# Altium PCB pcb.PCBDOC (part 2 of 2)
Units mil, origin at the board's own origin, x right, y up, seen from the top; angles counter-clockwise.
Board outline 6250 x 3000 mil, 6 copper layers (Top Layer, Mid-Layer 1, Internal Plane 1, Internal Plane 2, Mid-Layer 2, Bottom Layer); 199 components, 348 nets, 1713 pads, 133 vias.
Unrouted connection lines stored in the file: 1010.
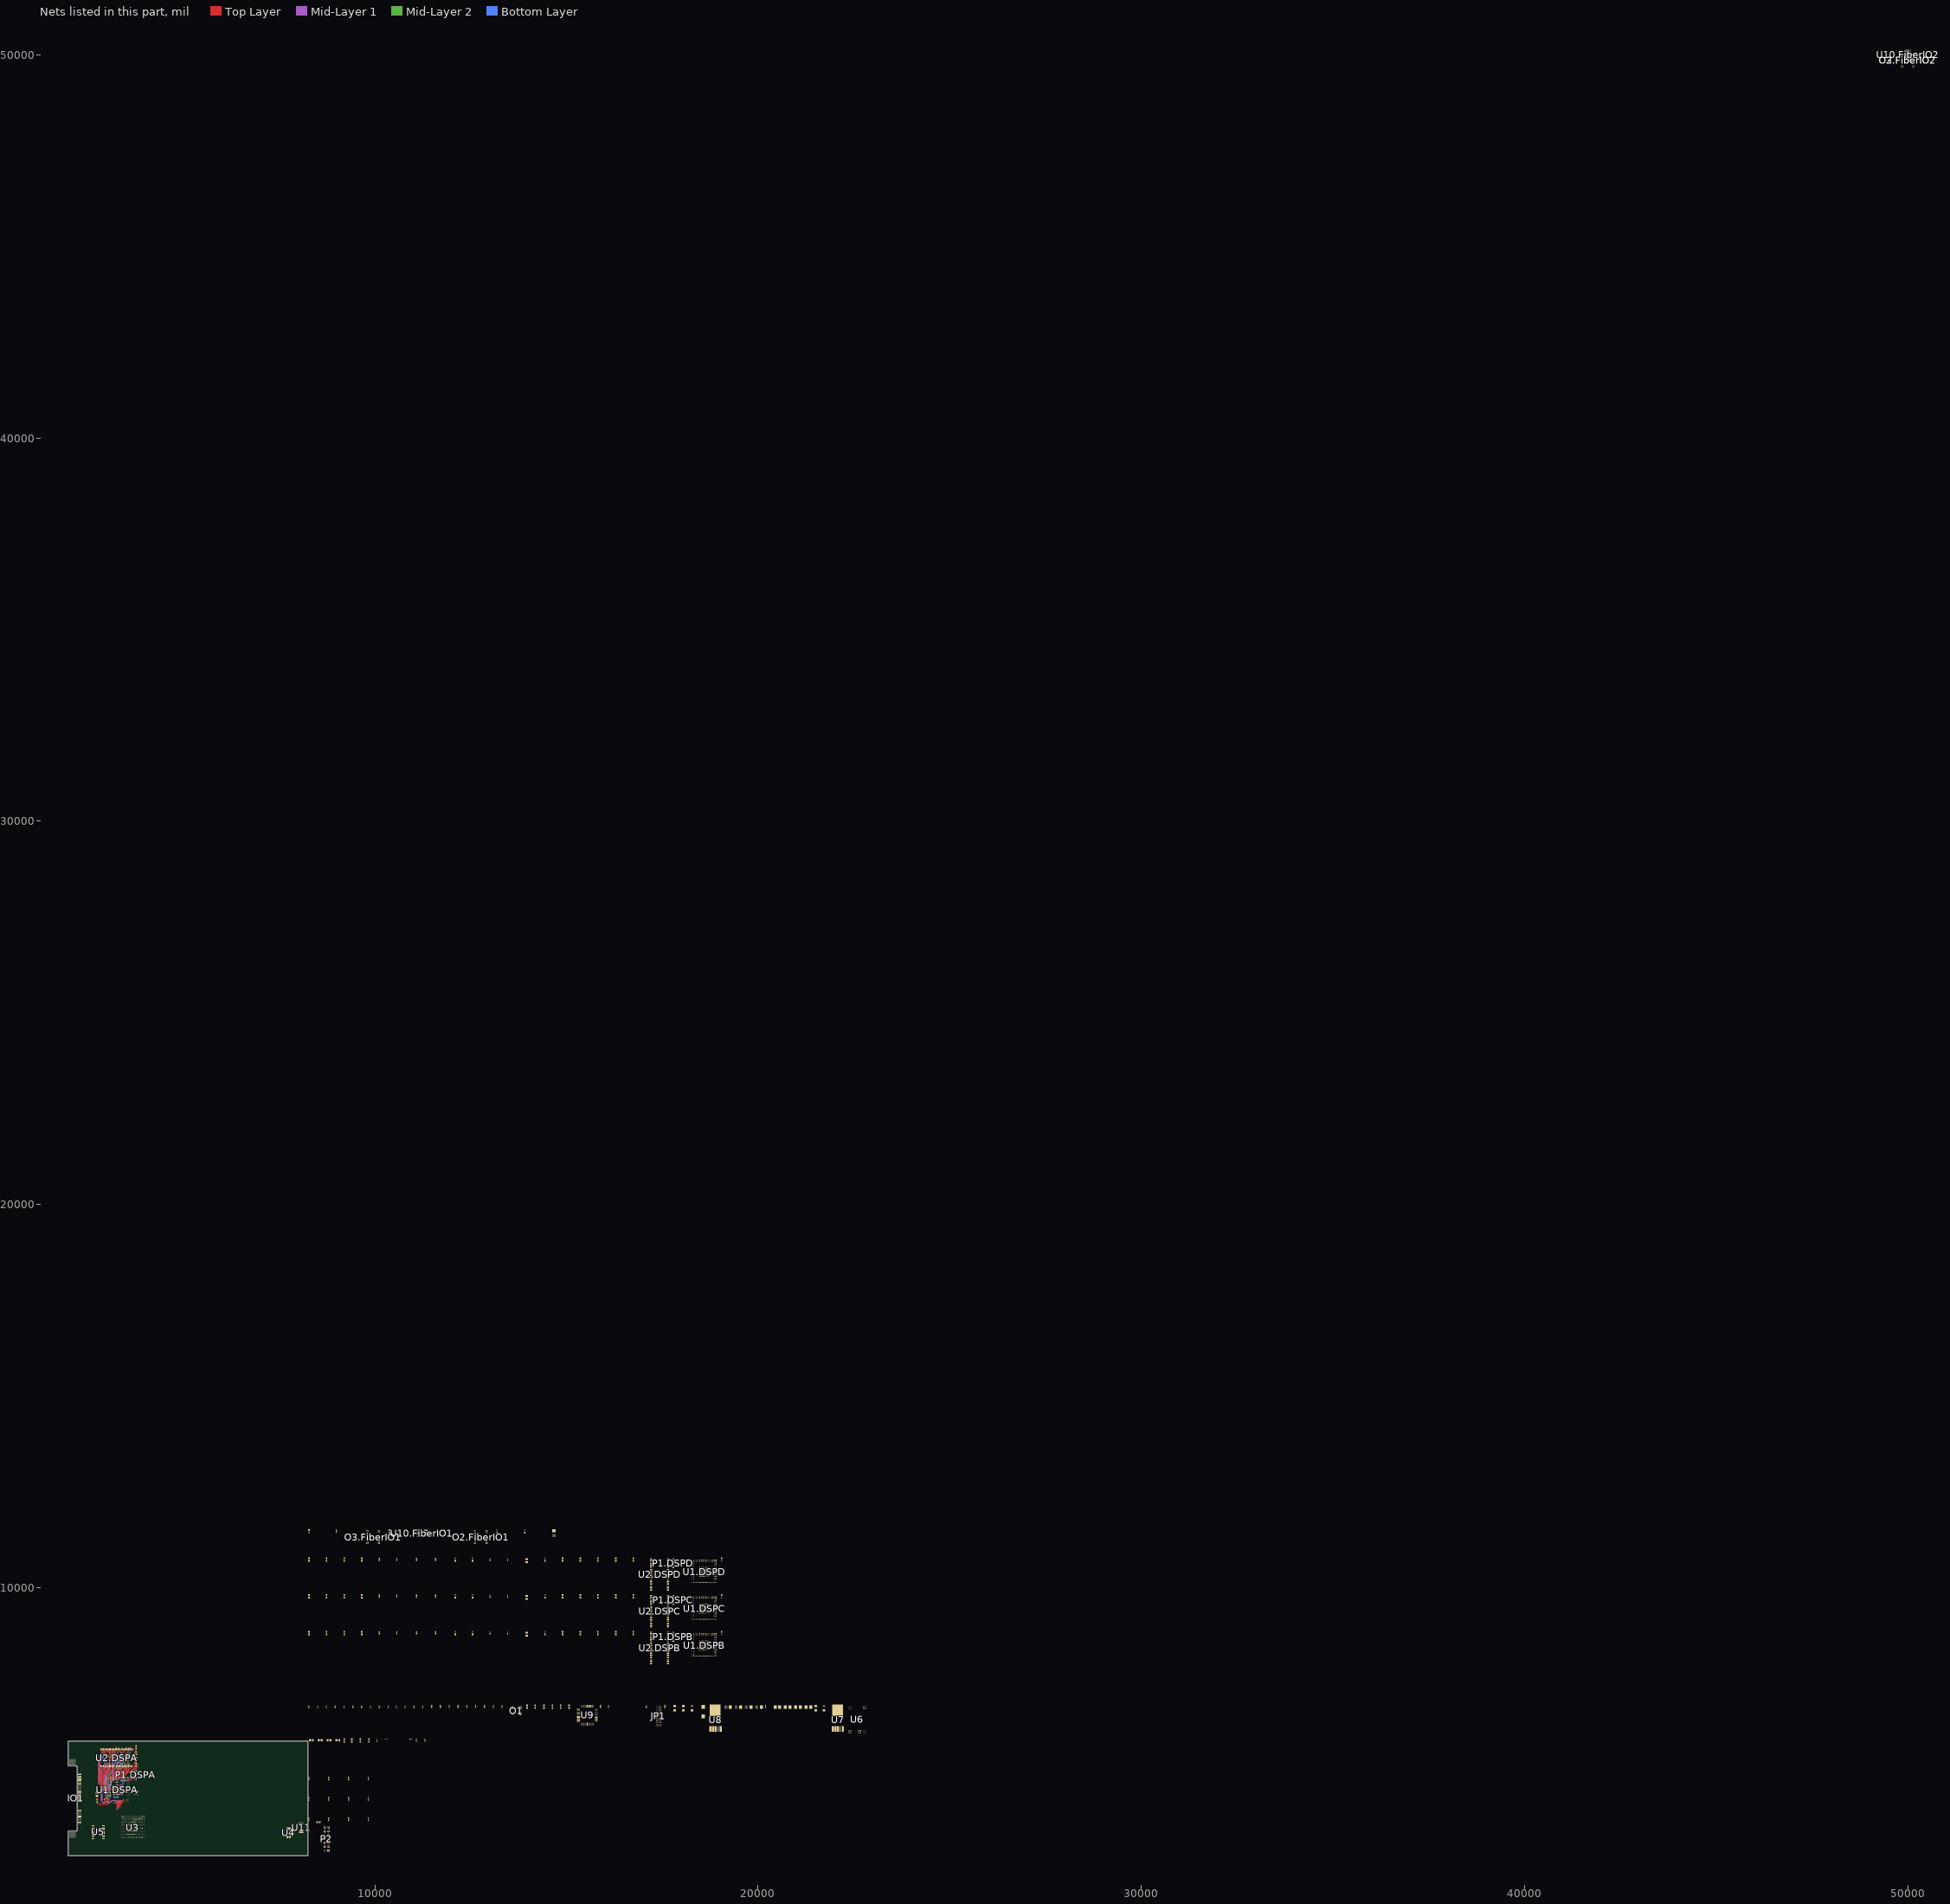
[diagram p6: the nets of this part, all layers, seen from the top]

## Via types
v1: diameter 24, hole 10, Top Layer to Bottom Layer, 133 vias

## Nets (pads, with @x,y where several pads share a name; then routed paths per layer and width w, separated by ;. In a path a pad name is that pad's centre, name@x,y a point inside that pad or via, vN(x,y) a via of type N, cw(c..) or ccw(c..) an arc to the next point about the centre after c; other vN are vias at no path point) (continued)
DSPTCK: P2.8 U4.8 U4.13 U11.3 U11.5
DSPTDI: P2.12 U4.11
DSPTDO: P2.14 U11.2
DSPTMS: P2.6 U4.1
FCLK: U3.T15 U9.38
FDONE: U3.R14 U9.37
FPROG: U3.B3 U9.36
GND: C1.DSPA.1 C1.DSPB.1 C1.DSPC.1 C1.DSPD.1 C2.DSPA.1 C2.DSPB.1 C2.DSPC.1 C2.DSPD.1 C3.DSPA.1 C3.DSPB.1 C3.DSPC.1 C3.DSPD.1 C4.DSPA.1 C4.DSPB.1 C4.DSPC.1 C4.DSPD.1 C5.DSPA.1 C5.DSPB.1 C5.DSPC.1 C5.DSPD.1 C6.DSPA.1 C6.DSPB.1 C6.DSPC.1 C6.DSPD.1 C7.DSPB.1 C7.DSPC.1 C7.DSPD.1 C8.DSPB.1 C8.DSPC.1 C8.DSPD.1 C9.DSPA.1 C9.DSPB.1 C9.DSPC.1 C9.DSPD.1 C10.DSPA.1 C10.DSPB.1 C10.DSPC.1 C10.DSPD.1 C11.DSPB.1 C11.DSPC.1 C11.DSPD.1 C12.DSPA.1 C12.DSPB.1 C12.DSPC.1 C12.DSPD.1 C13.1 C14.1 C15.1 C16.1 C17.2 C18.2 C19.2 C20.2 C21.2 C22.2 C23.2 C24.2 C25.2 C26.2 C27.1 C28.1 C29.2 C30.1 C31.1 C32.1 C33.1 C34.1 C35.1 C36.1 C37.1 C38.1 C39.1 C40.1 C41.1 C42.1 C43.1 C44.1 C45.1 C46.1 C47.1 C48.1 C49.1 C50.1 C51.1 C52.1 C53.1 C54.1 C55.1 C56.FiberIO1.2 C56.FiberIO2.2 C57.FiberIO1.2 C57.FiberIO2.2 C58.FiberIO1.2 C58.FiberIO2.2 C59.DSPA.1 C59.DSPB.1 C59.DSPC.1 C59.DSPD.1 C60.DSPA.1 C60.DSPB.1 C60.DSPC.1 C60.DSPD.1 C61.DSPA.1 C61.DSPB.1 C61.DSPC.1 C61.DSPD.1 C62.DSPA.1 C62.DSPB.1 C62.DSPC.1 C62.DSPD.1 DS1.DSPA.2 DS1.DSPB.2 DS1.DSPC.2 DS1.DSPD.2 DS2.2 DS3.2 DS4.2 DS5.2 IO1.1 IO1.4 IO1.7 IO1.P4 IO1.P5 IO1.P6 IO1.P10 IO1.P12 JP1.1 JP1.3 JP1.5 JP1.7 JP1.9 JP1.11 JP1.13 O1.2 O2.FiberIO1.3 O2.FiberIO1.4 O2.FiberIO1.5 O2.FiberIO1.8 O2.FiberIO2.3 O2.FiberIO2.4 O2.FiberIO2.5 O2.FiberIO2.8 O3.FiberIO1.2 O3.FiberIO1.4 O3.FiberIO1.5 O3.FiberIO1.8 O3.FiberIO2.2 O3.FiberIO2.4 O3.FiberIO2.5 O3.FiberIO2.8 P1.DSPA.3 P1.DSPB.3 P1.DSPC.3 P1.DSPD.3 P2.1 P2.4 P2.5 P2.7 P2.9 P2.11 P2.13 R4.DSPA.2 R4.DSPB.2 R4.DSPC.2 R4.DSPD.2 R5.DSPA.2 R5.DSPB.2 R5.DSPC.2 R5.DSPD.2 R7.DSPA.1 R7.DSPB.1 R7.DSPC.1 R7.DSPD.1 R10.1 R15.2 U1.DSPA.A10 U1.DSPA.B11 U1.DSPA.B16 U1.DSPA.F11 U1.DSPA.G7 U1.DSPA.G8 U1.DSPA.G9 U1.DSPA.G10 U1.DSPA.G11 U1.DSPA.H7 U1.DSPA.H8 U1.DSPA.H9 U1.DSPA.H10 U1.DSPA.H11 U1.DSPA.J7 U1.DSPA.J8 U1.DSPA.J9 U1.DSPA.J10 U1.DSPA.J11 U1.DSPA.K7 U1.DSPA.K8 U1.DSPA.K9 U1.DSPA.K10 U1.DSPA.K11 U1.DSPA.L7 U1.DSPA.L8 U1.DSPA.L9 U1.DSPA.L10 U1.DSPA.L11 U1.DSPA.M9 U1.DSPA.T16 U1.DSPB.A10 U1.DSPB.B11 U1.DSPB.B16 U1.DSPB.F11 U1.DSPB.G7 U1.DSPB.G8 U1.DSPB.G9 U1.DSPB.G10 U1.DSPB.G11 U1.DSPB.H7 U1.DSPB.H8 U1.DSPB.H9 U1.DSPB.H10 U1.DSPB.H11 U1.DSPB.J7 U1.DSPB.J8 U1.DSPB.J9 U1.DSPB.J10 U1.DSPB.J11 U1.DSPB.K7 U1.DSPB.K8 U1.DSPB.K9 U1.DSPB.K10 U1.DSPB.K11 U1.DSPB.L7 U1.DSPB.L8 U1.DSPB.L9 U1.DSPB.L10 U1.DSPB.L11 U1.DSPB.M9 U1.DSPB.T16 U1.DSPC.A10 U1.DSPC.B11 U1.DSPC.B16 U1.DSPC.F11 U1.DSPC.G7 U1.DSPC.G8 U1.DSPC.G9 U1.DSPC.G10 U1.DSPC.G11 U1.DSPC.H7 U1.DSPC.H8 U1.DSPC.H9 U1.DSPC.H10 U1.DSPC.H11 U1.DSPC.J7 U1.DSPC.J8 U1.DSPC.J9 U1.DSPC.J10 U1.DSPC.J11 U1.DSPC.K7 U1.DSPC.K8 U1.DSPC.K9 U1.DSPC.K10 U1.DSPC.K11 U1.DSPC.L7 U1.DSPC.L8 U1.DSPC.L9 U1.DSPC.L10 U1.DSPC.L11 U1.DSPC.M9 U1.DSPC.T16 U1.DSPD.A10 U1.DSPD.B11 U1.DSPD.B16 U1.DSPD.F11 U1.DSPD.G7 U1.DSPD.G8 U1.DSPD.G9 U1.DSPD.G10 U1.DSPD.G11 U1.DSPD.H7 U1.DSPD.H8 U1.DSPD.H9 U1.DSPD.H10 U1.DSPD.H11 U1.DSPD.J7 U1.DSPD.J8 U1.DSPD.J9 U1.DSPD.J10 U1.DSPD.J11 U1.DSPD.K7 U1.DSPD.K8 U1.DSPD.K9 U1.DSPD.K10 U1.DSPD.K11 U1.DSPD.L7 U1.DSPD.L8 U1.DSPD.L9 U1.DSPD.L10 U1.DSPD.L11 U1.DSPD.M9 U1.DSPD.T16 U2.DSPA.6 U2.DSPA.12 U2.DSPA.28 U2.DSPA.41 U2.DSPA.46 U2.DSPA.52 U2.DSPA.54 U2.DSPB.6 U2.DSPB.12 U2.DSPB.28 U2.DSPB.41 U2.DSPB.46 U2.DSPB.52 U2.DSPB.54 U2.DSPC.6 U2.DSPC.12 U2.DSPC.28 U2.DSPC.41 U2.DSPC.46 U2.DSPC.52 U2.DSPC.54 U2.DSPD.6 U2.DSPD.12 U2.DSPD.28 U2.DSPD.41 U2.DSPD.46 U2.DSPD.52 U2.DSPD.54 U3.A1 U3.A16 U3.B2 U3.B9 U3.B15 U3.F6 U3.F11 U3.G7 U3.G8 U3.G9 U3.G10 U3.H2 U3.H7 U3.H8 U3.H9 U3.H10 U3.J7 U3.J8 U3.J9 U3.J10 U3.J15 U3.K7 U3.K8 U3.K9 U3.K10 U3.L6 U3.L11 U3.R2 U3.R8 U3.R15 U3.T1 U3.T16 U4.7 U5.1 U5.12 U5.13 U5.14 U5.20 U5.22 U6.1 U7.3 U8.3 U9.4 U9.17 U9.25 U10.FiberIO1.4 U10.FiberIO1.6 U10.FiberIO1.7 U10.FiberIO2.4 U10.FiberIO2.6 U10.FiberIO2.7 U11.7 | length 1591.9
  Top Layer w7: DS1.DSPA.2@2744.09,4641.73 v1(2744.09,4716.54) ; U1.DSPA.B16@2992.13,4448.82 v1(3019.68,4476.38) ; U1.DSPA.T16@2992.13,5000 v1(3021.65,4970.47) ; U1.DSPA.B11@3188.98,4448.82 v1(3188.98,4484.25) ; v1(3188.98,4574.8) U1.DSPA.F11@3188.98,4606.3 ; U1.DSPA.L11@3188.98,4803.15 v1(3208.66,4783.46) ; v1(3200.79,4370.08) 3228.35,4397.64 U1.DSPA.A10@3228.35,4409.45 ; U1.DSPA.L10@3228.35,4803.15 v1(3248.03,4783.46) U1.DSPA.L9@3267.72,4803.15 ; U1.DSPA.M9@3267.72,4842.52 v1(3267.72,4874.02) ; U2.DSPA.46@3417.48,5341.5 3417.48,5293.15 v1(3425.2,5285.43) ; v1(3732.28,5870.08) R5.DSPA.2@3769.68,5870.08 ; R4.DSPA.2@3767.72,5566.93 v1(3807.09,5566.93) ; R7.DSPA.1@3799.21,4679.13 v1(3799.21,4720.47)
  Top Layer w12: U2.DSPA.28@2850.55,5341.5 v1(2850.55,5394.45) ; U2.DSPA.41@3260,5341.5 v1(3260,5395) ; v1(3320,5830) 3322.99,5827.01 U2.DSPA.12@3322.99,5778.5 ; U2.DSPA.6@3511.97,5778.5 v1(3511.97,5831.97) ; v1(3590,5400) 3606.46,5383.54 U2.DSPA.52@3606.46,5341.5 ; U2.DSPA.54@3669.45,5341.5 3691.5,5341.5 v1(3700,5350)
  Bottom Layer w7: v1(3019.68,4476.38) 3019.68,4537.46 C2.DSPA.1@3049.15,4566.93 ; v1(3019.68,4673.23) 3027.5,4681.04 C4.DSPA.1@3027.5,4714.57 ; C3.DSPA.1@3183.13,4822.83 3183.13,4808.99 v1(3208.66,4783.46) ; C1.DSPA.1@3271.65,4921.26 v1(3314.96,4921.26)
  Bottom Layer w12: v1(3260,5395) 3274.41,5380.59 C61.DSPA.1@3274.41,5340 ; C60.DSPA.1@3305.59,5780 3305.59,5815.59 v1(3320,5830) ; v1(3511.97,5831.97) 3526.16,5817.78 C59.DSPA.1@3526.16,5780 ; C62.DSPA.1@3573.84,5340 3573.84,5383.84 v1(3590,5400)
  Bottom Layer w14: v1(3188.98,4574.8) 3188.98,4553.15 C6.DSPA.1@3214.57,4527.56 ; v1(3287.4,4665.35) 3301.18,4651.57 C12.DSPA.1@3301.18,4616.14 ; v1(3326.77,4704.72) 3342.46,4720.41 C10.DSPA.1@3366.14,4720.41 ; v1@3393.64,4925.26 C5.DSPA.1@3393.64,4960.63 ; v1(3397.64,4921.26) 3423.17,4895.73 C9.DSPA.1@3425.2,4895.73
  other v1: 3208.66,4665.35 3248.03,4665.35 3326.77,4665.35 3208.66,4704.72 3248.03,4704.72 3287.4,4704.72 3208.66,4744.09 3248.03,4744.09 3287.4,4744.09 3326.77,4744.09 3287.4,4783.46 3326.77,4783.46
NetC21_1: C21.1 U7.5
NetC29_1: C29.1 U8.5
NetC58.FiberIO1_1: C58.FiberIO1.1 O3.FiberIO1.3 R25.FiberIO1.2
NetC58.FiberIO2_1: C58.FiberIO2.1 O3.FiberIO2.3 R25.FiberIO2.2
NetDS1.DSPA_1: DS1.DSPA.1 R6.DSPA.2 | length 100.4
  Top Layer w7: R6.DSPA.2@2748.03,4470.47 DS1.DSPA.1@2748.03,4570.87
NetDS1.DSPB_1: DS1.DSPB.1 R6.DSPB.2
NetDS1.DSPC_1: DS1.DSPC.1 R6.DSPC.2
NetDS1.DSPD_1: DS1.DSPD.1 R6.DSPD.2
NetDS2_1: DS2.1 R11.2
NetDS3_1: DS3.1 R12.2
NetDS4_1: DS4.1 R13.2
NetDS5_1: DS5.1 R14.2
NetIO1_P13: IO1.P13 IO1.P14 IO1.P15 U9.8
NetO1_3: O1.3 U3.R9 U9.1
NetO2.FiberIO1_1: O2.FiberIO1.1 R22.FiberIO1.1
NetO2.FiberIO1_2: O2.FiberIO1.2 R23.FiberIO1.1 U10.FiberIO1.3
NetO2.FiberIO2_1: O2.FiberIO2.1 R22.FiberIO2.1
NetO2.FiberIO2_2: O2.FiberIO2.2 R23.FiberIO2.1 U10.FiberIO2.3
NetO3.FiberIO1_1: O3.FiberIO1.1 R24.FiberIO1.2
NetO3.FiberIO2_1: O3.FiberIO2.1 R24.FiberIO2.2
NetP1.DSPA_1: P1.DSPA.1 U1.DSPA.R2 | length 241.3
  Top Layer w7: U1.DSPA.R2@3543.31,4960.63 3562.99,4980.31 3651.57,4980.31 3691.26,5020 P1.DSPA.1@3760,5020
NetP1.DSPA_2: P1.DSPA.2 U1.DSPA.T1 | length 226.1
  Top Layer w7: U1.DSPA.T1@3582.68,5000 3592.52,5000 3710.63,5118.11 P1.DSPA.2@3759.84,5118.11
NetP1.DSPB_1: P1.DSPB.1 U1.DSPB.R2
NetP1.DSPB_2: P1.DSPB.2 U1.DSPB.T1
NetP1.DSPC_1: P1.DSPC.1 U1.DSPC.R2
NetP1.DSPC_2: P1.DSPC.2 U1.DSPC.T1
NetP1.DSPD_1: P1.DSPD.1 U1.DSPD.R2
NetP1.DSPD_2: P1.DSPD.2 U1.DSPD.T1
NetP2_3: P2.3
NetR2.DSPA_2: R2.DSPA.2 R4.DSPA.1 U1.DSPA.T5 | length 757.3
  Top Layer w7: U1.DSPA.T5@3425.2,5000 3444.88,5019.69 3444.88,5055.12 3582.68,5192.91 3649.61,5192.91 3740.16,5283.46 3783.46,5283.46 3811.02,5311.02 3811.02,5397.64 3795.28,5413.39 3767.72,5413.39 3769.68,5415.35 R4.DSPA.1@3769.68,5498.03
NetR2.DSPB_2: R2.DSPB.2 R4.DSPB.1 U1.DSPB.T5
NetR2.DSPC_2: R2.DSPC.2 R4.DSPC.1 U1.DSPC.T5
NetR2.DSPD_2: R2.DSPD.2 R4.DSPD.1 U1.DSPD.T5
NetR3.DSPA_2: R3.DSPA.2 R5.DSPA.1 U1.DSPA.U5 | length 946.8
  Top Layer w7: U1.DSPA.U5@3425.2,5039.37 3425.2,5062.99 3578.74,5216.54 3629.92,5216.54 3732.28,5318.9 3732.28,5692.91 3748.03,5708.66 3765.75,5708.66 R3.DSPA.2@3769.68,5712.6 R5.DSPA.1@3769.68,5803.15
NetR3.DSPB_2: R3.DSPB.2 R5.DSPB.1 U1.DSPB.U5
NetR3.DSPC_2: R3.DSPC.2 R5.DSPC.1 U1.DSPC.U5
NetR3.DSPD_2: R3.DSPD.2 R5.DSPD.1 U1.DSPD.U5
NetR6.DSPA_1: R6.DSPA.1 U1.DSPA.B4 | length 787.8
  Top Layer w7: R6.DSPA.1@2755.91,4395.67 2801.18,4350.39 v1(3039.37,4350.39) ; v1(3440.94,4472.44) U1.DSPA.B4@3464.57,4448.82
  Mid-Layer 1 w7: v1(3039.37,4350.39) 3137.8,4448.82 3417.32,4448.82 v1(3440.94,4472.44)
NetR6.DSPB_1: R6.DSPB.1 U1.DSPB.B4
NetR6.DSPC_1: R6.DSPC.1 U1.DSPC.B4
NetR6.DSPD_1: R6.DSPD.1 U1.DSPD.B4
NetR7_1: R7.1 U1.DSPA.U1 U1.DSPB.U1 U1.DSPC.U1 U1.DSPD.U1 U4.3
NetR11_1: R11.1 U3.T14
NetR12_1: R12.1 U3.T13
NetR13_1: R13.1 U3.T12
NetR14_1: R14.1 U3.T10
NetR15_1: R15.1 U6.4
NetR16_2: R16.2 U3.C14
NetR17_1: R17.1 U9.11
NetR18_1: R18.1 U9.10
NetR19_1: R19.1 U3.C13
NetR20_1: R20.1 U9.24
NetR20_2: R20.2 U3.A2
NetR21_1: R21.1 U9.9
NetR24.FiberIO1_1: R24.FiberIO1.1 U3.N10
NetR24.FiberIO2_1: R24.FiberIO2.1 U3.R11
NetU1.DSPA_J16: U1.DSPA.J16 U2.DSPA.23 | length 1253.7
  Top Layer w7: v1(2976.54,5641.89) U2.DSPA.23@2976.54,5778.5 ; U1.DSPA.J16@2992.13,4724.41 2996.06,4724.41 v1(3019.68,4748.03)
  Bottom Layer w7: v1(2976.54,5641.89) 2807.09,5472.44 2807.09,4913.39 2972.44,4748.03 v1(3019.68,4748.03)
NetU1.DSPA_J17: U1.DSPA.J17 U2.DSPA.24 | length 1184.6
  Top Layer w7: U2.DSPA.24@2945.04,5778.5 2945.04,5685.2 2791.34,5531.5 2791.34,4885.83 U1.DSPA.J17@2952.76,4724.41
NetU1.DSPA_K16: U1.DSPA.K16 U2.DSPA.25 | length 1172.9
  Top Layer w7: v1(2913.39,5716.54) U2.DSPA.25@2913.39,5779.53 ; U1.DSPA.K16@2992.13,4763.78 3015.75,4787.4 v1(3019.68,4787.4)
  Mid-Layer 1 w7: v1(2913.39,5527.56) v1(2913.39,5716.54)
  Bottom Layer w7: v1(2913.39,5527.56) 2826.77,5440.94 2826.77,5358.27 2834.65,5350.39 2834.65,4925.2 2972.44,4787.4 v1(3019.68,4787.4)
NetU1.DSPA_K17: U1.DSPA.K17 U2.DSPA.26 | length 1101.2
  Top Layer w7: v1(2818.9,5519.69) 2818.9,4897.64 U1.DSPA.K17@2952.76,4763.78 ; v1(2881.89,5696.85) U2.DSPA.26@2881.89,5783.46
  Mid-Layer 1 w7: v1(2818.9,5519.69) 2818.9,5633.86 v1(2881.89,5696.85)
NetU1.DSPA_L16: U1.DSPA.L16 U2.DSPA.29 | length 653
  Top Layer w7: v1(2862.2,5283.46) 2881.89,5303.15 U2.DSPA.29@2881.89,5341.34 ; U1.DSPA.L16@2992.13,4803.15 v1(3019.68,4830.71)
  Bottom Layer w7: v1(2862.2,5283.46) 2862.2,4937.01 2968.5,4830.71 v1(3019.68,4830.71)
NetU1.DSPA_L17: U1.DSPA.L17 U2.DSPA.30 | length 615.1
  Top Layer w7: U2.DSPA.30@2913.39,5346.46 2913.39,5299.21 2846.46,5232.28 2846.46,4909.45 U1.DSPA.L17@2952.76,4803.15
NetU1.DSPA_M16: U1.DSPA.M16 U2.DSPA.31 | length 614.6
  Top Layer w7: v1(2889.76,5244.09) 2944.88,5299.21 U2.DSPA.31@2944.88,5341.34 ; U1.DSPA.M16@2992.13,4842.52 v1(3019.68,4870.08)
  Bottom Layer w7: v1(2889.76,5244.09) 2889.76,4952.76 2972.44,4870.08 v1(3019.68,4870.08)
NetU1.DSPA_M17: U1.DSPA.M17 U2.DSPA.32 | length 570.8
  Top Layer w7: U1.DSPA.M17@2952.76,4842.52 2877.95,4917.32 2877.95,5196.85 2976.54,5295.43 U2.DSPA.32@2976.54,5341.5
NetU1.DSPA_N16: U1.DSPA.N16 U2.DSPA.34 | length 579.6
  Top Layer w7: v1(2929.13,5145.67) 3039.53,5256.06 U2.DSPA.34@3039.53,5341.5 ; U1.DSPA.N16@2992.13,4881.89 3011.81,4901.57 v1(3019.68,4901.57)
  Bottom Layer w7: v1(2929.13,5145.67) 2929.13,4956.69 2984.25,4901.57 v1(3019.68,4901.57)
NetU1.DSPA_N17: U1.DSPA.N17 U2.DSPA.33 | length 528.2
  Top Layer w7: U1.DSPA.N17@2952.76,4881.89 2905.51,4929.13 2905.51,5161.42 3011.81,5267.72 U2.DSPA.33@3011.81,5346.46
NetU1.DSPA_P16: U1.DSPA.P16 U2.DSPA.35 | length 618.9
  Top Layer w7: U1.DSPA.P16@2992.13,4921.26 3007.87,4921.26 v1(3019.68,4933.07) ; v1(3039.37,5401.57) 3071.02,5369.92 U2.DSPA.35@3071.02,5341.5
  Mid-Layer 1 w7: v1@3019.68,4937.01 v1(3019.68,4933.07) 2992.13,4960.63 2992.13,5133.86 3051.18,5192.91 3051.18,5389.76 v1(3039.37,5401.57)
NetU1.DSPA_R17: U1.DSPA.R17 U2.DSPA.36 | length 464.4
  Top Layer w7: U1.DSPA.R17@2952.76,4960.63 2925.2,4988.19 2925.2,5106.3 3106.3,5287.4 U2.DSPA.36@3106.3,5338.58
NetU1.DSPA_T3: U1.DSPA.T3 U1.DSPB.T3 U1.DSPC.T3 U1.DSPD.T3 U4.2
NetU1.DSPA_T4: U1.DSPA.T4 U1.DSPB.U3
NetU1.DSPA_T6: U1.DSPA.T6 U2.DSPA.53 | length 460.3
  Top Layer w7: U1.DSPA.T6@3385.83,5000 3405.51,5019.69 3405.51,5068.9 3481.61,5145 3641.73,5305.12 U2.DSPA.53@3641.73,5354.33
NetU1.DSPA_T7: U1.DSPA.T7 U2.DSPA.50 | length 423.1
  Top Layer w7: U1.DSPA.T7@3346.46,5000 3366.14,5019.69 3366.14,5108.27 3543.46,5285.59 U2.DSPA.50@3543.46,5341.5
NetU1.DSPA_T8: U1.DSPA.T8 U2.DSPA.45 | length 390.5
  Top Layer w7: U1.DSPA.T8@3307.09,5000 3287.4,5019.69 3287.4,5127.95 3385.98,5226.54 U2.DSPA.45@3385.98,5341.5
NetU1.DSPA_T9: U1.DSPA.T9 U2.DSPA.42 | length 367.7
  Top Layer w7: U1.DSPA.T9@3267.72,5000 3248.03,5019.68 3248.03,5167.32 3291.5,5210.79 U2.DSPA.42@3291.5,5341.5
NetU1.DSPA_T10: U1.DSPA.T10 U2.DSPA.11 | length 897.2
  Top Layer w7: U1.DSPA.T10@3228.35,5000 v1(3255.91,4972.44) ; v1(3354.33,5712.6) U2.DSPA.11@3354.33,5763.78
  Mid-Layer 1 w7: v1(3255.91,4972.44) 3255.91,4988.19 3385.83,5118.11 3385.83,5681.1 v1(3354.33,5712.6)
NetU1.DSPA_T11: U1.DSPA.T11 U2.DSPA.7 | length 915.1
  Top Layer w7: U1.DSPA.T11@3188.98,5000 3208.66,5019.69 3208.66,5216.54 v1(3257.87,5265.75) ; U2.DSPA.7@3480.47,5791.18 3480.47,5712.44 v1(3484.25,5708.66)
  Mid-Layer 2 w7: v1(3257.87,5265.75) 3484.25,5492.13 v1(3484.25,5708.66)
NetU1.DSPA_T12: U1.DSPA.T12 U2.DSPA.4 | length 1036.4
  Top Layer w7: U1.DSPA.T12@3149.61,5000 v1(3179.13,4970.47) ; v1(3572.83,5718.5) 3574.8,5720.47 U2.DSPA.4@3574.8,5791.34
  Mid-Layer 1 w7: v1(3179.13,4970.47) v1@3188.98,4970.47
  Mid-Layer 2 w7: v1(3179.13,4970.47) 3562.99,5354.33 3562.99,5698.82 3572.83,5708.66 v1(3572.83,5718.5)
NetU1.DSPA_U2: U1.DSPA.U2 U1.DSPB.U2 U1.DSPC.U2 U1.DSPD.U2 U4.6
NetU1.DSPA_U3: U1.DSPA.U3 U4.10
NetU1.DSPA_U4: U1.DSPA.U4 U11.6
NetU1.DSPA_U6: U1.DSPA.U6 U2.DSPA.51 | length 380.5
  Top Layer w7: U1.DSPA.U6@3385.83,5039.37 3385.83,5088.58 3574.96,5277.72 U2.DSPA.51@3574.96,5341.5
NetU1.DSPA_U7: U1.DSPA.U7 U2.DSPA.48 | length 362.2
  Top Layer w7: U1.DSPA.U7@3346.46,5039.37 3346.46,5118.11 3484.25,5255.91 U2.DSPA.48@3484.25,5344.49
NetU1.DSPA_U8: U1.DSPA.U8 U2.DSPA.47 | length 360.9
  Top Layer w7: U1.DSPA.U8@3307.09,5039.37 3307.09,5118.11 3448.98,5260 U2.DSPA.47@3448.98,5341.5
NetU1.DSPA_U9: U1.DSPA.U9 U2.DSPA.44 | length 341.8
  Top Layer w7: U1.DSPA.U9@3267.72,5039.37 3267.72,5147.64 3356.3,5236.22 U2.DSPA.44@3356.3,5344.49
NetU1.DSPA_U10: U1.DSPA.U10 U2.DSPA.13 | length 770.1
  Top Layer w7: U1.DSPA.U10@3228.35,5039.37 3228.35,5187.01 v1(3267.72,5226.38) ; v1(3291.5,5712.44) U2.DSPA.13@3291.5,5778.5
  Mid-Layer 1 w7: v1(3267.72,5226.38) 3297.24,5255.91 3297.24,5706.69 v1(3291.5,5712.44)
NetU1.DSPA_U11: U1.DSPA.U11 U2.DSPA.10 | length 820.5
  Top Layer w7: U1.DSPA.U11@3188.98,5039.37 3188.98,5236.22 v1(3218.5,5265.75) ; v1(3385.83,5724.41) U2.DSPA.10@3385.83,5778.35
  Mid-Layer 2 w7: v1(3218.5,5265.75) 3287.4,5334.65 3287.4,5413.39 3385.83,5511.81 v1(3385.83,5724.41)
NetU1.DSPA_U12: U1.DSPA.U12 U2.DSPA.8 | length 1194.4
  Top Layer w7: v1(3149.61,4950.79) 3129.92,4970.47 3129.92,5019.69 U1.DSPA.U12@3149.61,5039.37 ; v1(3356.3,5620.08) 3448.98,5712.76 U2.DSPA.8@3448.98,5778.5
  Mid-Layer 1 w7: v1(3149.61,4950.79) 3149.61,4980.31 3356.3,5187.01 v1(3356.3,5620.08) ; 3326.77,5157.48 3326.77,5295.28
NetU1.DSPA_U13: U1.DSPA.U13 U2.DSPA.5 | length 940.6
  Top Layer w7: U1.DSPA.U13@3110.24,5039.37 3129.92,5059.06 v1(3129.92,5068.9) ; v1(3464.57,5423.23) 3543.31,5501.97 U2.DSPA.5@3543.31,5777.56
  Bottom Layer w7: v1(3129.92,5068.9) 3169.29,5108.27 3208.66,5108.27 3464.57,5364.17 v1(3464.57,5423.23)
NetU1.DSPA_U14: U1.DSPA.U14 U2.DSPA.2 | length 1043.2
  Top Layer w7: U1.DSPA.U14@3070.87,5039.37 3070.87,5078.74 v1(3129.92,5137.8) ; v1(3637.95,5704.88) U2.DSPA.2@3637.95,5778.5
  Bottom Layer w7: v1(3129.92,5137.8) 3179.13,5187.01 3179.13,5364.17 3415.35,5600.39 3533.46,5600.39 v1(3637.95,5704.88)
NetU1.DSPB_J16: U1.DSPB.J16 U2.DSPB.23
NetU1.DSPB_J17: U1.DSPB.J17 U2.DSPB.24
NetU1.DSPB_K16: U1.DSPB.K16 U2.DSPB.25
NetU1.DSPB_K17: U1.DSPB.K17 U2.DSPB.26
NetU1.DSPB_L16: U1.DSPB.L16 U2.DSPB.29
NetU1.DSPB_L17: U1.DSPB.L17 U2.DSPB.30
NetU1.DSPB_M16: U1.DSPB.M16 U2.DSPB.31
NetU1.DSPB_M17: U1.DSPB.M17 U2.DSPB.32
NetU1.DSPB_N16: U1.DSPB.N16 U2.DSPB.34
NetU1.DSPB_N17: U1.DSPB.N17 U2.DSPB.33
NetU1.DSPB_P16: U1.DSPB.P16 U2.DSPB.35
NetU1.DSPB_R17: U1.DSPB.R17 U2.DSPB.36
NetU1.DSPB_T4: U1.DSPB.T4 U1.DSPC.U3
NetU1.DSPB_T6: U1.DSPB.T6 U2.DSPB.53
NetU1.DSPB_T7: U1.DSPB.T7 U2.DSPB.50
NetU1.DSPB_T8: U1.DSPB.T8 U2.DSPB.45
NetU1.DSPB_T9: U1.DSPB.T9 U2.DSPB.42
NetU1.DSPB_T10: U1.DSPB.T10 U2.DSPB.11
NetU1.DSPB_T11: U1.DSPB.T11 U2.DSPB.7
NetU1.DSPB_T12: U1.DSPB.T12 U2.DSPB.4
NetU1.DSPB_U4: U1.DSPB.U4 U4.12
NetU1.DSPB_U6: U1.DSPB.U6 U2.DSPB.51
NetU1.DSPB_U7: U1.DSPB.U7 U2.DSPB.48
NetU1.DSPB_U8: U1.DSPB.U8 U2.DSPB.47
NetU1.DSPB_U9: U1.DSPB.U9 U2.DSPB.44
NetU1.DSPB_U10: U1.DSPB.U10 U2.DSPB.13
NetU1.DSPB_U11: U1.DSPB.U11 U2.DSPB.10
NetU1.DSPB_U12: U1.DSPB.U12 U2.DSPB.8
NetU1.DSPB_U13: U1.DSPB.U13 U2.DSPB.5
NetU1.DSPB_U14: U1.DSPB.U14 U2.DSPB.2
NetU1.DSPC_J16: U1.DSPC.J16 U2.DSPC.23
NetU1.DSPC_J17: U1.DSPC.J17 U2.DSPC.24
NetU1.DSPC_K16: U1.DSPC.K16 U2.DSPC.25
NetU1.DSPC_K17: U1.DSPC.K17 U2.DSPC.26
NetU1.DSPC_L16: U1.DSPC.L16 U2.DSPC.29
NetU1.DSPC_L17: U1.DSPC.L17 U2.DSPC.30
NetU1.DSPC_M16: U1.DSPC.M16 U2.DSPC.31
NetU1.DSPC_M17: U1.DSPC.M17 U2.DSPC.32
NetU1.DSPC_N16: U1.DSPC.N16 U2.DSPC.34
NetU1.DSPC_N17: U1.DSPC.N17 U2.DSPC.33
NetU1.DSPC_P16: U1.DSPC.P16 U2.DSPC.35
NetU1.DSPC_R17: U1.DSPC.R17 U2.DSPC.36
NetU1.DSPC_T4: U1.DSPC.T4 U1.DSPD.U3
NetU1.DSPC_T6: U1.DSPC.T6 U2.DSPC.53
NetU1.DSPC_T7: U1.DSPC.T7 U2.DSPC.50
NetU1.DSPC_T8: U1.DSPC.T8 U2.DSPC.45
NetU1.DSPC_T9: U1.DSPC.T9 U2.DSPC.42
NetU1.DSPC_T10: U1.DSPC.T10 U2.DSPC.11
NetU1.DSPC_T11: U1.DSPC.T11 U2.DSPC.7
NetU1.DSPC_T12: U1.DSPC.T12 U2.DSPC.4
NetU1.DSPC_U4: U1.DSPC.U4 U4.9
NetU1.DSPC_U6: U1.DSPC.U6 U2.DSPC.51
NetU1.DSPC_U7: U1.DSPC.U7 U2.DSPC.48
NetU1.DSPC_U8: U1.DSPC.U8 U2.DSPC.47
NetU1.DSPC_U9: U1.DSPC.U9 U2.DSPC.44
NetU1.DSPC_U10: U1.DSPC.U10 U2.DSPC.13
NetU1.DSPC_U11: U1.DSPC.U11 U2.DSPC.10
NetU1.DSPC_U12: U1.DSPC.U12 U2.DSPC.8
NetU1.DSPC_U13: U1.DSPC.U13 U2.DSPC.5
NetU1.DSPC_U14: U1.DSPC.U14 U2.DSPC.2
NetU1.DSPD_J16: U1.DSPD.J16 U2.DSPD.23
NetU1.DSPD_J17: U1.DSPD.J17 U2.DSPD.24
NetU1.DSPD_K16: U1.DSPD.K16 U2.DSPD.25
NetU1.DSPD_K17: U1.DSPD.K17 U2.DSPD.26
NetU1.DSPD_L16: U1.DSPD.L16 U2.DSPD.29
NetU1.DSPD_L17: U1.DSPD.L17 U2.DSPD.30
NetU1.DSPD_M16: U1.DSPD.M16 U2.DSPD.31
NetU1.DSPD_M17: U1.DSPD.M17 U2.DSPD.32
NetU1.DSPD_N16: U1.DSPD.N16 U2.DSPD.34
NetU1.DSPD_N17: U1.DSPD.N17 U2.DSPD.33
NetU1.DSPD_P16: U1.DSPD.P16 U2.DSPD.35
NetU1.DSPD_R17: U1.DSPD.R17 U2.DSPD.36
NetU1.DSPD_T4: U1.DSPD.T4 U11.1
NetU1.DSPD_T6: U1.DSPD.T6 U2.DSPD.53
NetU1.DSPD_T7: U1.DSPD.T7 U2.DSPD.50
NetU1.DSPD_T8: U1.DSPD.T8 U2.DSPD.45
NetU1.DSPD_T9: U1.DSPD.T9 U2.DSPD.42
NetU1.DSPD_T10: U1.DSPD.T10 U2.DSPD.11
NetU1.DSPD_T11: U1.DSPD.T11 U2.DSPD.7
NetU1.DSPD_T12: U1.DSPD.T12 U2.DSPD.4
NetU1.DSPD_U4: U1.DSPD.U4 U11.4
NetU1.DSPD_U6: U1.DSPD.U6 U2.DSPD.51
NetU1.DSPD_U7: U1.DSPD.U7 U2.DSPD.48
NetU1.DSPD_U8: U1.DSPD.U8 U2.DSPD.47
NetU1.DSPD_U9: U1.DSPD.U9 U2.DSPD.44
NetU1.DSPD_U10: U1.DSPD.U10 U2.DSPD.13
NetU1.DSPD_U11: U1.DSPD.U11 U2.DSPD.10
NetU1.DSPD_U12: U1.DSPD.U12 U2.DSPD.8
NetU1.DSPD_U13: U1.DSPD.U13 U2.DSPD.5
NetU1.DSPD_U14: U1.DSPD.U14 U2.DSPD.2
NetU3_M6: U3.M6 U5.3
NetU3_M11: U3.M11 U9.39
NetU3_N9: U3.N9 U9.40
NetU3_P10: U3.P10 U10.FiberIO1.2
NetU3_R13: U3.R13 U10.FiberIO2.2
NetU3_T5: U3.T5 U5.10
PPI0: U1.DSPA.B9 U1.DSPB.B9 U1.DSPC.B9 U1.DSPD.B9 U3.B13 | length 226.3
  Top Layer w7: U1.DSPA.B9@3267.72,4448.82 3287.4,4429.13 3287.4,4236.22 v1(3291.34,4232.28)
PPI1: U1.DSPA.A9 U1.DSPB.A9 U1.DSPC.A9 U1.DSPD.A9 U3.B14 | length 200.8
  Top Layer w6: v1(3267.72,4208.66) U1.DSPA.A9@3267.72,4409.45
PPI2: U1.DSPA.B8 U1.DSPB.B8 U1.DSPC.B8 U1.DSPD.B8 U3.C9 | length 182.3
  Top Layer w7: U1.DSPA.B8@3307.09,4448.82 3326.77,4429.13 3326.77,4291.34 v1(3338.58,4279.53)
PPI3: U1.DSPA.A8 U1.DSPB.A8 U1.DSPC.A8 U1.DSPD.A8 U3.C10 | length 156.8
  Top Layer w7: U1.DSPA.A8@3307.09,4409.45 3307.09,4263.78 v1(3314.96,4255.91)
PPI4: U1.DSPA.B7 U1.DSPB.B7 U1.DSPC.B7 U1.DSPD.B7 U3.C11 | length 138.4
  Top Layer w7: U1.DSPA.B7@3346.46,4448.82 3366.14,4429.13 3366.14,4346.46 v1(3385.83,4326.77)
PPI5: U1.DSPA.A7 U1.DSPB.A7 U1.DSPC.A7 U1.DSPD.A7 U3.C12 | length 112.8
  Top Layer w7: U1.DSPA.A7@3346.46,4409.45 3346.46,4318.9 v1(3362.2,4303.15)
PPI6: U1.DSPA.B6 U1.DSPB.B6 U1.DSPC.B6 U1.DSPD.B6 U3.D9 | length 94.4
  Top Layer w7: U1.DSPA.B6@3385.83,4448.82 3405.51,4429.13 3405.51,4401.57 v1(3433.07,4374.02)
PPI7: U1.DSPA.A6 U1.DSPB.A6 U1.DSPC.A6 U1.DSPD.A6 U3.D10 | length 68.8
  Top Layer w7: U1.DSPA.A6@3385.83,4409.45 3385.83,4374.02 v1(3409.45,4350.39)
PPICLK: U1.DSPA.B10 U1.DSPB.B10 U1.DSPC.B10 U1.DSPD.B10 U3.E10
RXCLK: U3.P8 U5.9
RXDAT0: U3.T3 U5.28
RXDAT1: U3.T4 U5.27
RXDAT2: U3.N6 U5.26
RXDAT3: U3.N5 U5.25
RXDAT4: U3.N8 U5.24
RXDAT5: U3.N7 U5.19
RXDAT6: U3.P6 U5.18
RXDAT7: U3.P5 U5.17
RXDAT8: U3.R6 U5.16
RXDAT9: U3.P7 U5.15
S\C\A\S\.DSPA: U1.DSPA.A16 U2.DSPA.17 | length 1629.8
  Top Layer w7: v1(2972.44,4374.02) 2972.44,4389.76 U1.DSPA.A16@2992.13,4409.45 ; v1(3031.5,5433.07) 3165.51,5567.09 U2.DSPA.17@3165.51,5778.5
  Mid-Layer 1 w7: v1(2972.44,4374.02) 2921.26,4374.02 2885.83,4409.45 2885.83,4700.79 2972.44,4787.4 2972.44,5374.02 v1(3031.5,5433.07)
S\C\A\S\.DSPB: U1.DSPB.A16 U2.DSPB.17
S\C\A\S\.DSPC: U1.DSPC.A16 U2.DSPC.17
S\C\A\S\.DSPD: U1.DSPD.A16 U2.DSPD.17
S\C\K\E\.DSPA: U1.DSPA.B14 U2.DSPA.37 | length 1096.1
  Top Layer w7: U1.DSPA.B14@3070.87,4448.82 3070.87,4484.25 v1(3098.43,4511.81) ; v1(3118.11,5409.45) 3133.86,5393.7 U2.DSPA.37@3133.86,5342.52
  Mid-Layer 2 w7: v1(3098.43,4511.81) 3098.43,4633.86 3086.61,4645.67 3086.61,4818.9 3125.98,4858.27 3125.98,4996.06 3157.48,5027.56 3157.48,5370.08 v1(3118.11,5409.45)
S\C\K\E\.DSPB: U1.DSPB.B14 U2.DSPB.37
S\C\K\E\.DSPC: U1.DSPC.B14 U2.DSPC.37
S\C\K\E\.DSPD: U1.DSPD.B14 U2.DSPD.37
S\M\S\.DSPA: U1.DSPA.A17 U2.DSPA.19 | length 1552.2
  Top Layer w7: v1(2862.2,4421.26) 2874.02,4409.45 U1.DSPA.A17@2952.76,4409.45 ; v1(3043.31,5523.62) 3102.36,5582.68 3102.36,5778.35 U2.DSPA.19@3102.52,5778.5
  Mid-Layer 1 w7: v1(2862.2,4421.26) 2862.2,4732.28 2952.28,4822.35 2952.28,5432.59 v1(3043.31,5523.62)
S\M\S\.DSPB: U1.DSPB.A17 U2.DSPB.19
S\M\S\.DSPC: U1.DSPC.A17 U2.DSPC.19
S\M\S\.DSPD: U1.DSPD.A17 U2.DSPD.19
S\R\A\S\.DSPA: U1.DSPA.A15 U2.DSPA.18 | length 1418
  Top Layer w7: U1.DSPA.A15@3031.5,4409.45 3051.18,4429.13 v1(3051.18,4519.69) ; v1(3133.86,5708.66) 3134.02,5708.82 U2.DSPA.18@3134.02,5778.5
  Mid-Layer 2 w7: v1(3051.18,4519.69) 3043.31,4527.56 3043.31,5244.09 3090.55,5291.34 3090.55,5535.43 3133.86,5578.74 v1(3133.86,5708.66)
S\R\A\S\.DSPB: U1.DSPB.A15 U2.DSPB.18
S\R\A\S\.DSPC: U1.DSPC.A15 U2.DSPC.18
S\R\A\S\.DSPD: U1.DSPD.A15 U2.DSPD.18
S\W\E\.DSPA: U1.DSPA.B17 U2.DSPA.16 | length 1475.4
  Top Layer w7: v1(2921.26,4448.82) U1.DSPA.B17@2952.76,4448.82 ; v1(3197.01,5559.21) U2.DSPA.16@3197.01,5778.5
  Mid-Layer 1 w7: v1(2921.26,4448.82) 3031.5,4559.05 3031.5,4645.67 3070.87,4685.04 v1(3070.87,4901.57)
  Bottom Layer w7: v1(3070.87,4901.57) 3098.43,4929.13 3098.43,5094.49 3106.3,5102.36 3106.3,5161.42 3157.48,5212.6 3157.48,5519.69 v1(3197.01,5559.21)
S\W\E\.DSPB: U1.DSPB.B17 U2.DSPB.16
S\W\E\.DSPC: U1.DSPC.B17 U2.DSPC.16
S\W\E\.DSPD: U1.DSPD.B17 U2.DSPD.16
SA10.DSPA: U1.DSPA.B15 U2.DSPA.22 | length 1580.5
  Top Layer w7: v1(3007.87,5681.1) 3008.03,5681.26 U2.DSPA.22@3008.03,5778.5 ; v1(3011.81,4374.02) 3011.81,4429.13 U1.DSPA.B15@3031.5,4448.82
  Mid-Layer 2 w7: v1(3007.87,5681.1) 3007.87,5633.86 3066.93,5574.8 3066.93,5295.28 3023.62,5251.97 3023.62,5031.5 2992.13,5000 2992.13,4543.31 3047.24,4488.19 3047.24,4409.45 v1(3011.81,4374.02)
SA10.DSPB: U1.DSPB.B15 U2.DSPB.22
SA10.DSPC: U1.DSPC.B15 U2.DSPC.22
SA10.DSPD: U1.DSPD.B15 U2.DSPD.22
SB0.DSPA: U1.DSPA.U16 U2.DSPA.20 | length 778.2
  Top Layer w7: U1.DSPA.U16@2992.13,5039.37 3051.18,5098.43 3051.18,5161.42 v1(3078.74,5188.98) ; U2.DSPA.20@3071.02,5778.5 3071.02,5614.02 v1(3078.74,5606.3)
  Mid-Layer 1 w7: v1(3078.74,5188.98) v1(3078.74,5606.3)
SB0.DSPB: U1.DSPB.U16 U2.DSPB.20
SB0.DSPC: U1.DSPC.U16 U2.DSPC.20
SB0.DSPD: U1.DSPD.U16 U2.DSPD.20
SB1.DSPA: U1.DSPA.T14 U2.DSPA.21 | length 949.1
  Top Layer w7: v1(3041.34,5708.66) U2.DSPA.21@3041.34,5787.4 ; v1(3070.87,4960.63) U1.DSPA.T14@3070.87,5000
  Mid-Layer 1 w7: v1(3041.34,5708.66) 3156.29,5593.71 3156.29,5046.06 v1(3070.87,4960.63)
SB1.DSPB: U1.DSPB.T14 U2.DSPB.21
SB1.DSPC: U1.DSPC.T14 U2.DSPC.21
SB1.DSPD: U1.DSPD.T14 U2.DSPD.21
SCLK.DSPA: U1.DSPA.D16 U2.DSPA.38 | length 886.7
  Top Layer w7: U1.DSPA.D16@2992.13,4527.56 3070.87,4606.3 v1(3070.87,4625.98) ; v1(3106.3,5232.28) 3165.35,5291.34 U2.DSPA.38@3165.35,5342.52
  Mid-Layer 2 w7: v1(3070.87,4625.98) 3070.87,4842.52 3106.3,4877.95 v1(3106.3,5232.28)
SCLK.DSPB: U1.DSPB.D16 U2.DSPB.38
SCLK.DSPC: U1.DSPC.D16 U2.DSPC.38
SCLK.DSPD: U1.DSPD.D16 U2.DSPD.38
SDQM0.DSPA: U1.DSPA.H16 U2.DSPA.15 | length 1240
  Top Layer w7: U1.DSPA.H16@2992.13,4685.04 3055.12,4748.03 v1(3110.24,4748.03) ; U2.DSPA.15@3224.41,5783.46 3224.41,5720.47 v1(3228.35,5716.54)
  Mid-Layer 1 w7: v1(3110.24,4748.03) 3098.43,4759.84 3098.43,4937.01 3116.13,4954.71 3116.13,4966.52 3133.86,4984.25 3179.13,5029.53 3179.13,5374.02 3228.35,5423.23 v1(3228.35,5716.54)
SDQM0.DSPB: U1.DSPB.H16 U2.DSPB.15
SDQM0.DSPC: U1.DSPC.H16 U2.DSPC.15
SDQM0.DSPD: U1.DSPD.H16 U2.DSPD.15
SDQM1.DSPA: U1.DSPA.H17 U2.DSPA.39 | length 859.4
  Top Layer w7: v1(2913.39,4685.04) U1.DSPA.H17@2952.76,4685.04 ; v1(3080.71,5127.95) 3080.71,5157.48 3169.29,5246.06 3197.01,5273.78 U2.DSPA.39@3197.01,5341.5
  Mid-Layer 1 w7: v1(2913.39,4685.04) 2933.07,4704.72 3011.81,4704.72 3047.24,4740.16 3047.24,5094.49 3059.13,5106.37 v1(3080.71,5127.95)
SDQM1.DSPB: U1.DSPB.H17 U2.DSPB.39
SDQM1.DSPC: U1.DSPC.H17 U2.DSPC.39
SDQM1.DSPD: U1.DSPD.H17 U2.DSPD.39
TCK: JP1.6 R16.1 R17.2
TDI: JP1.10 R21.2
TDO: JP1.8 U3.A15
TMS: JP1.4 R18.2 R19.2
VCC: C5.DSPA.2 C5.DSPB.2 C5.DSPC.2 C5.DSPD.2 C6.DSPA.2 C6.DSPB.2 C6.DSPC.2 C6.DSPD.2 C7.DSPB.2 C7.DSPC.2 C7.DSPD.2 C8.DSPB.2 C8.DSPC.2 C8.DSPD.2 C9.DSPA.2 C9.DSPB.2 C9.DSPC.2 C9.DSPD.2 C10.DSPA.2 C10.DSPB.2 C10.DSPC.2 C10.DSPD.2 C11.DSPB.2 C11.DSPC.2 C11.DSPD.2 C12.DSPA.2 C12.DSPB.2 C12.DSPC.2 C12.DSPD.2 C13.2 C14.2 C15.2 C17.1 C18.1 C19.1 C20.1 C26.1 C27.2 C31.2 C32.2 C33.2 C34.2 C35.2 C36.2 C37.2 C38.2 C39.2 C40.2 C41.2 C59.DSPA.2 C59.DSPB.2 C59.DSPC.2 C59.DSPD.2 C60.DSPA.2 C60.DSPB.2 C60.DSPC.2 C60.DSPD.2 C61.DSPA.2 C61.DSPB.2 C61.DSPC.2 C61.DSPD.2 C62.DSPA.2 C62.DSPB.2 C62.DSPC.2 C62.DSPD.2 IO1.P1 IO1.P2 IO1.P3 JP1.2 O1.4 R1.DSPA.2 R1.DSPB.2 R1.DSPC.2 R1.DSPD.2 R2.DSPA.1 R2.DSPB.1 R2.DSPC.1 R2.DSPD.1 R3.DSPA.1 R3.DSPB.1 R3.DSPC.1 R3.DSPD.1 R7.2 R8.1 U1.DSPA.B2 U1.DSPA.C17 U1.DSPA.F6 U1.DSPA.F7 U1.DSPA.F8 U1.DSPA.F9 U1.DSPA.F10 U1.DSPA.G6 U1.DSPA.H6 U1.DSPA.J6 U1.DSPA.K6 U1.DSPA.L6 U1.DSPA.M6 U1.DSPA.M7 U1.DSPA.M8 U1.DSPA.T2 U1.DSPB.B2 U1.DSPB.C17 U1.DSPB.F6 U1.DSPB.F7 U1.DSPB.F8 U1.DSPB.F9 U1.DSPB.F10 U1.DSPB.G6 U1.DSPB.H6 U1.DSPB.J6 U1.DSPB.K6 U1.DSPB.L6 U1.DSPB.M6 U1.DSPB.M7 U1.DSPB.M8 U1.DSPB.T2 U1.DSPC.B2 U1.DSPC.C17 U1.DSPC.F6 U1.DSPC.F7 U1.DSPC.F8 U1.DSPC.F9 U1.DSPC.F10 U1.DSPC.G6 U1.DSPC.H6 U1.DSPC.J6 U1.DSPC.K6 U1.DSPC.L6 U1.DSPC.M6 U1.DSPC.M7 U1.DSPC.M8 U1.DSPC.T2 U1.DSPD.B2 U1.DSPD.C17 U1.DSPD.F6 U1.DSPD.F7 U1.DSPD.F8 U1.DSPD.F9 U1.DSPD.F10 U1.DSPD.G6 U1.DSPD.H6 U1.DSPD.J6 U1.DSPD.K6 U1.DSPD.L6 U1.DSPD.M6 U1.DSPD.M7 U1.DSPD.M8 U1.DSPD.T2 U2.DSPA.1 U2.DSPA.3 U2.DSPA.9 U2.DSPA.14 U2.DSPA.27 U2.DSPA.43 U2.DSPA.49 U2.DSPB.1 U2.DSPB.3 U2.DSPB.9 U2.DSPB.14 U2.DSPB.27 U2.DSPB.43 U2.DSPB.49 U2.DSPC.1 U2.DSPC.3 U2.DSPC.9 U2.DSPC.14 U2.DSPC.27 U2.DSPC.43 U2.DSPC.49 U2.DSPD.1 U2.DSPD.3 U2.DSPD.9 U2.DSPD.14 U2.DSPD.27 U2.DSPD.43 U2.DSPD.49 U3.E8 U3.E9 U3.F7 U3.F8 U3.F9 U3.F10 U3.G6 U3.G11 U3.H5 U3.H6 U3.H11 U3.H12 U3.J11 U3.J12 U3.K11 U3.L7 U3.L8 U3.L9 U3.L10 U3.M8 U3.M9 U4.14 U5.2 U5.4 U5.7 U5.8 U5.11 U5.21 U5.23 U6.2 U7.1 U7.2 U8.1 U8.2 U9.7 U9.26 U9.35 U11.14 | length 1603.6
  Top Layer w7: v1(2921.26,4488.19) U1.DSPA.C17@2956.69,4488.19 ; v1(3228.35,4574.8) U1.DSPA.F10@3228.35,4606.3 ; v1(3267.72,4574.8) U1.DSPA.F9@3267.72,4606.3 ; v1(3307.09,4574.8) U1.DSPA.F8@3307.09,4606.3 ; U1.DSPA.M8@3307.09,4842.52 v1(3307.09,4874.02) ; v1(3346.46,4574.8) U1.DSPA.F7@3346.46,4606.3 ; U1.DSPA.M7@3346.46,4842.52 v1(3346.46,4874.02) ; U1.DSPA.F6@3385.83,4606.3 v1(3421.26,4606.3) ; U1.DSPA.G6@3385.83,4645.67 v1(3421.26,4645.67) ; U1.DSPA.H6@3385.83,4685.04 v1(3421.26,4685.04) ; U1.DSPA.J6@3385.83,4724.41 v1(3421.26,4724.41) ; U1.DSPA.K6@3385.83,4763.78 v1(3421.26,4763.78) ; U1.DSPA.L6@3385.83,4803.15 v1(3421.26,4803.15) ; U1.DSPA.M6@3385.83,4842.52 v1(3385.83,4874.02) ; U2.DSPA.9@3417.48,5778.5 v1(3417.48,5834.8) ; v1(3507.87,4484.25) U1.DSPA.B2@3543.31,4448.82 ; v1(3511.81,4968.5) U1.DSPA.T2@3543.31,5000 ; R1.DSPA.2@3736.22,4677.17 v1(3736.22,4724.41) ; v1(3767.72,5307.09) R2.DSPA.1@3767.72,5354.33 ; R3.DSPA.1@3767.72,5645.67 v1(3811.02,5645.67)
  Top Layer w12: v1(2850,5730) U2.DSPA.27@2850,5780 ; v1(3250,5830) 3260,5820 U2.DSPA.14@3260,5778.5 ; U2.DSPA.43@3322.99,5341.5 3325,5343.5 v1(3325,5395) ; U2.DSPA.49@3511.97,5341.5 3511.97,5386.97 v1(3525,5400) ; v1(3600,5835) 3606.46,5828.54 U2.DSPA.3@3606.46,5778.5 ; U2.DSPA.1@3670,5775 v1(3700,5775)
  Bottom Layer w12: C60.DSPA.2@3254.41,5780 v1@3254.41,5825.59 ; v1(3325,5395) 3325.59,5394.41 C61.DSPA.2@3325.59,5340 ; C62.DSPA.2@3522.66,5340 3522.66,5397.66 v1(3525,5400) ; C59.DSPA.2@3577.34,5780 3577.34,5812.34 v1(3600,5835)
  Bottom Layer w14: C6.DSPA.2@3281.5,4527.56 3307.09,4553.15 v1(3307.09,4574.8) ; v1(3346.46,4574.8) 3352.36,4580.71 C12.DSPA.2@3352.36,4616.14 ; C10.DSPA.2@3366.14,4771.59 3413.45,4771.59 v1(3421.26,4763.78) ; v1(3385.83,4874.02) 3385.83,4850.39 3393.7,4842.52 C9.DSPA.2@3425.2,4842.52 ; v1@3425.2,4807.09 C9.DSPA.2@3425.2,4844.55 ; C5.DSPA.2@3460.57,4960.63 v1@3503.94,4960.63
pads on no net: IO1.0 IO1.P11 JP1.12 JP1.14 O1.1 U1.DSPA.A2 U1.DSPA.A3 U1.DSPA.A4 U1.DSPA.A5 U1.DSPA.A11 U1.DSPA.A13 U1.DSPA.B3 U1.DSPA.B5 U1.DSPA.B12 U1.DSPA.B13 U1.DSPA.C16 U1.DSPA.D17 U1.DSPA.E16 U1.DSPA.E17 U1.DSPA.F1 U1.DSPA.F2 U1.DSPA.F16 U1.DSPA.F17 U1.DSPA.G1 U1.DSPA.G2 U1.DSPA.G16 U1.DSPA.G17 U1.DSPA.H1 U1.DSPA.H2 U1.DSPA.J1 U1.DSPA.J2 U1.DSPA.P1 U1.DSPA.P2 U1.DSPA.P17 U1.DSPA.R1 U1.DSPA.R16 U1.DSPA.T13 U1.DSPA.T15 U1.DSPA.T17 U1.DSPA.U15 U1.DSPA.U17 U1.DSPB.A2 U1.DSPB.A3 U1.DSPB.A4 U1.DSPB.A5 U1.DSPB.A11 U1.DSPB.A13 U1.DSPB.B3 U1.DSPB.B5 U1.DSPB.B12 U1.DSPB.B13 U1.DSPB.C16 U1.DSPB.D17 U1.DSPB.E16 U1.DSPB.E17 U1.DSPB.F1 U1.DSPB.F2 U1.DSPB.F16 U1.DSPB.F17 U1.DSPB.G1 U1.DSPB.G2 U1.DSPB.G16 U1.DSPB.G17 U1.DSPB.H1 U1.DSPB.H2 U1.DSPB.J1 U1.DSPB.J2 U1.DSPB.P1 U1.DSPB.P2 U1.DSPB.P17 U1.DSPB.R1 U1.DSPB.R16 U1.DSPB.T13 U1.DSPB.T15 U1.DSPB.T17 U1.DSPB.U15 U1.DSPB.U17 U1.DSPC.A2 U1.DSPC.A3 U1.DSPC.A4 U1.DSPC.A5 U1.DSPC.A11 U1.DSPC.A13 U1.DSPC.B3 U1.DSPC.B5 U1.DSPC.B12 U1.DSPC.B13 U1.DSPC.C16 U1.DSPC.D17 U1.DSPC.E16 U1.DSPC.E17 U1.DSPC.F1 U1.DSPC.F2 U1.DSPC.F16 U1.DSPC.F17 U1.DSPC.G1 U1.DSPC.G2 U1.DSPC.G16 U1.DSPC.G17 U1.DSPC.H1 U1.DSPC.H2 U1.DSPC.J1 U1.DSPC.J2 U1.DSPC.P1 U1.DSPC.P2 U1.DSPC.P17 U1.DSPC.R1 U1.DSPC.R16 U1.DSPC.T13 U1.DSPC.T15 U1.DSPC.T17 U1.DSPC.U15 U1.DSPC.U17 U1.DSPD.A2 U1.DSPD.A3 U1.DSPD.A4 U1.DSPD.A5 U1.DSPD.A11 U1.DSPD.A13 U1.DSPD.B3 U1.DSPD.B5 U1.DSPD.B12 U1.DSPD.B13 U1.DSPD.C16 U1.DSPD.D17 U1.DSPD.E16 U1.DSPD.E17 U1.DSPD.F1 U1.DSPD.F2 U1.DSPD.F16 U1.DSPD.F17 U1.DSPD.G1 U1.DSPD.G2 U1.DSPD.G16 U1.DSPD.G17 U1.DSPD.H1 U1.DSPD.H2 U1.DSPD.J1 U1.DSPD.J2 U1.DSPD.P1 U1.DSPD.P2 U1.DSPD.P17 U1.DSPD.R1 U1.DSPD.R16 U1.DSPD.T13 U1.DSPD.T15 U1.DSPD.T17 U1.DSPD.U15 U1.DSPD.U17 U2.DSPA.40 U2.DSPB.40 U2.DSPC.40 U2.DSPD.40 U3.A9 U3.A14 U3.B10 U3.B11 U3.B12 U3.C4 U3.C5 U3.D11 U3.D12 U3.E4 U3.E11 U3.F12 U3.J1 U3.J2 U3.J3 U3.J4 U3.K1 U3.K2 U3.K3 U3.K4 U3.K5 U3.L4 U3.L5 U3.M1 U3.M2 U3.M3 U3.M4 U3.M7 U3.M10 U3.M13 U3.N1 U3.N2 U3.N3 U3.N11 U3.N12 U3.P1 U3.P2 U3.P3 U3.P4 U3.P9 U3.P11 U3.P12 U3.P13 U3.R1 U3.R3 U3.R4 U3.R5 U3.R7 U3.R10 U3.R12 U3.T2 U3.T7 U3.T8 U3.T9 U6.3 U9.2 U9.3 U9.5 U9.6 U9.12 U9.13 U9.14 U9.16 U9.18 U9.19 U9.20 U9.21 U9.22 U9.23 U9.27 U9.28 U9.29 U9.30 U9.31 U9.32 U9.33 U9.34 U9.41 U9.42 U9.43 U9.44 U10.FiberIO1.5 U10.FiberIO2.5 U11.8 U11.9 U11.10 U11.11 U11.12 U11.13

## Polygon pours and split planes (outlines as drawn)
GND on Top Layer (solid): 3169.29,4822.83 3169.29,4625.98 3366.14,4625.98 3366.14,4822.83
no net on Internal Plane 1 (split plane): 2020.02,3020.01 2020.02,3623.09 2194.88,3623.09 ccw(c2194.88,3682.48) 2254.26,3682.48 2254.26,5317.52 ccw(c2194.88,5317.52) 2194.88,5376.9 2020.02,5376.9 2020.02,5979.98 8229.99,5979.98 8229.99,3020.01
no net on Internal Plane 2 (split plane): 2020.02,3020.01 2020.02,3623.09 2194.88,3623.09 ccw(c2194.88,3682.48) 2254.26,3682.48 2254.26,5317.52 ccw(c2194.88,5317.52) 2194.88,5376.9 2020.02,5376.9 2020.02,5979.98 8229.99,5979.98 8229.99,3020.01

## Keep-outs
Keep-Out Layer:
  lines w10: 2050,3050 2050,5950 8200,5950 8200,3050 2050,3050

## Silkscreen, mask and mechanical layers (free items; w line width, h text height)
Mechanical 4:
  lines w1: 3224.41,4169.29 3228.35,4169.29 3444.88,4385.83
Mechanical 5:
  lines w1: 8250,3000 2000,3000 2000,3643.11 2194.88,3643.11 ccw(c2194.88,3682.48) 2234.25,3682.48 2234.25,5317.52 ccw(c2194.88,5317.52) 2194.88,5356.89 2000,5356.89 2000,6000 8250,6000

## Dimensions
2050,3050 to 2050,5950 on Mechanical 1
2050,3050 to 8200,3050 on Mechanical 1

## Text inside footprints (layer, text, board x,y; h text height)
IO1: Top Overlay "MOLEX 87703-0001" at 2452.24,3620 h30 r90
P2: Top Overlay "2" at 8710,3020 h50 r90; Top Overlay "1" at 8810,3020 h50 r90; Top Overlay "14" at 8710,3820 h50 r90; Top Overlay "13" at 8810,3820 h50 r90